# Altium PCB V3.pcbdoc
Units mil, origin at the board's own origin, x right, y up, seen from the top; angles counter-clockwise.
Board outline 2315.8 x 2138.56 mil, 2 copper layers (Top Layer, Bottom Layer); 57 components, 65 nets, 241 pads, 33 vias.
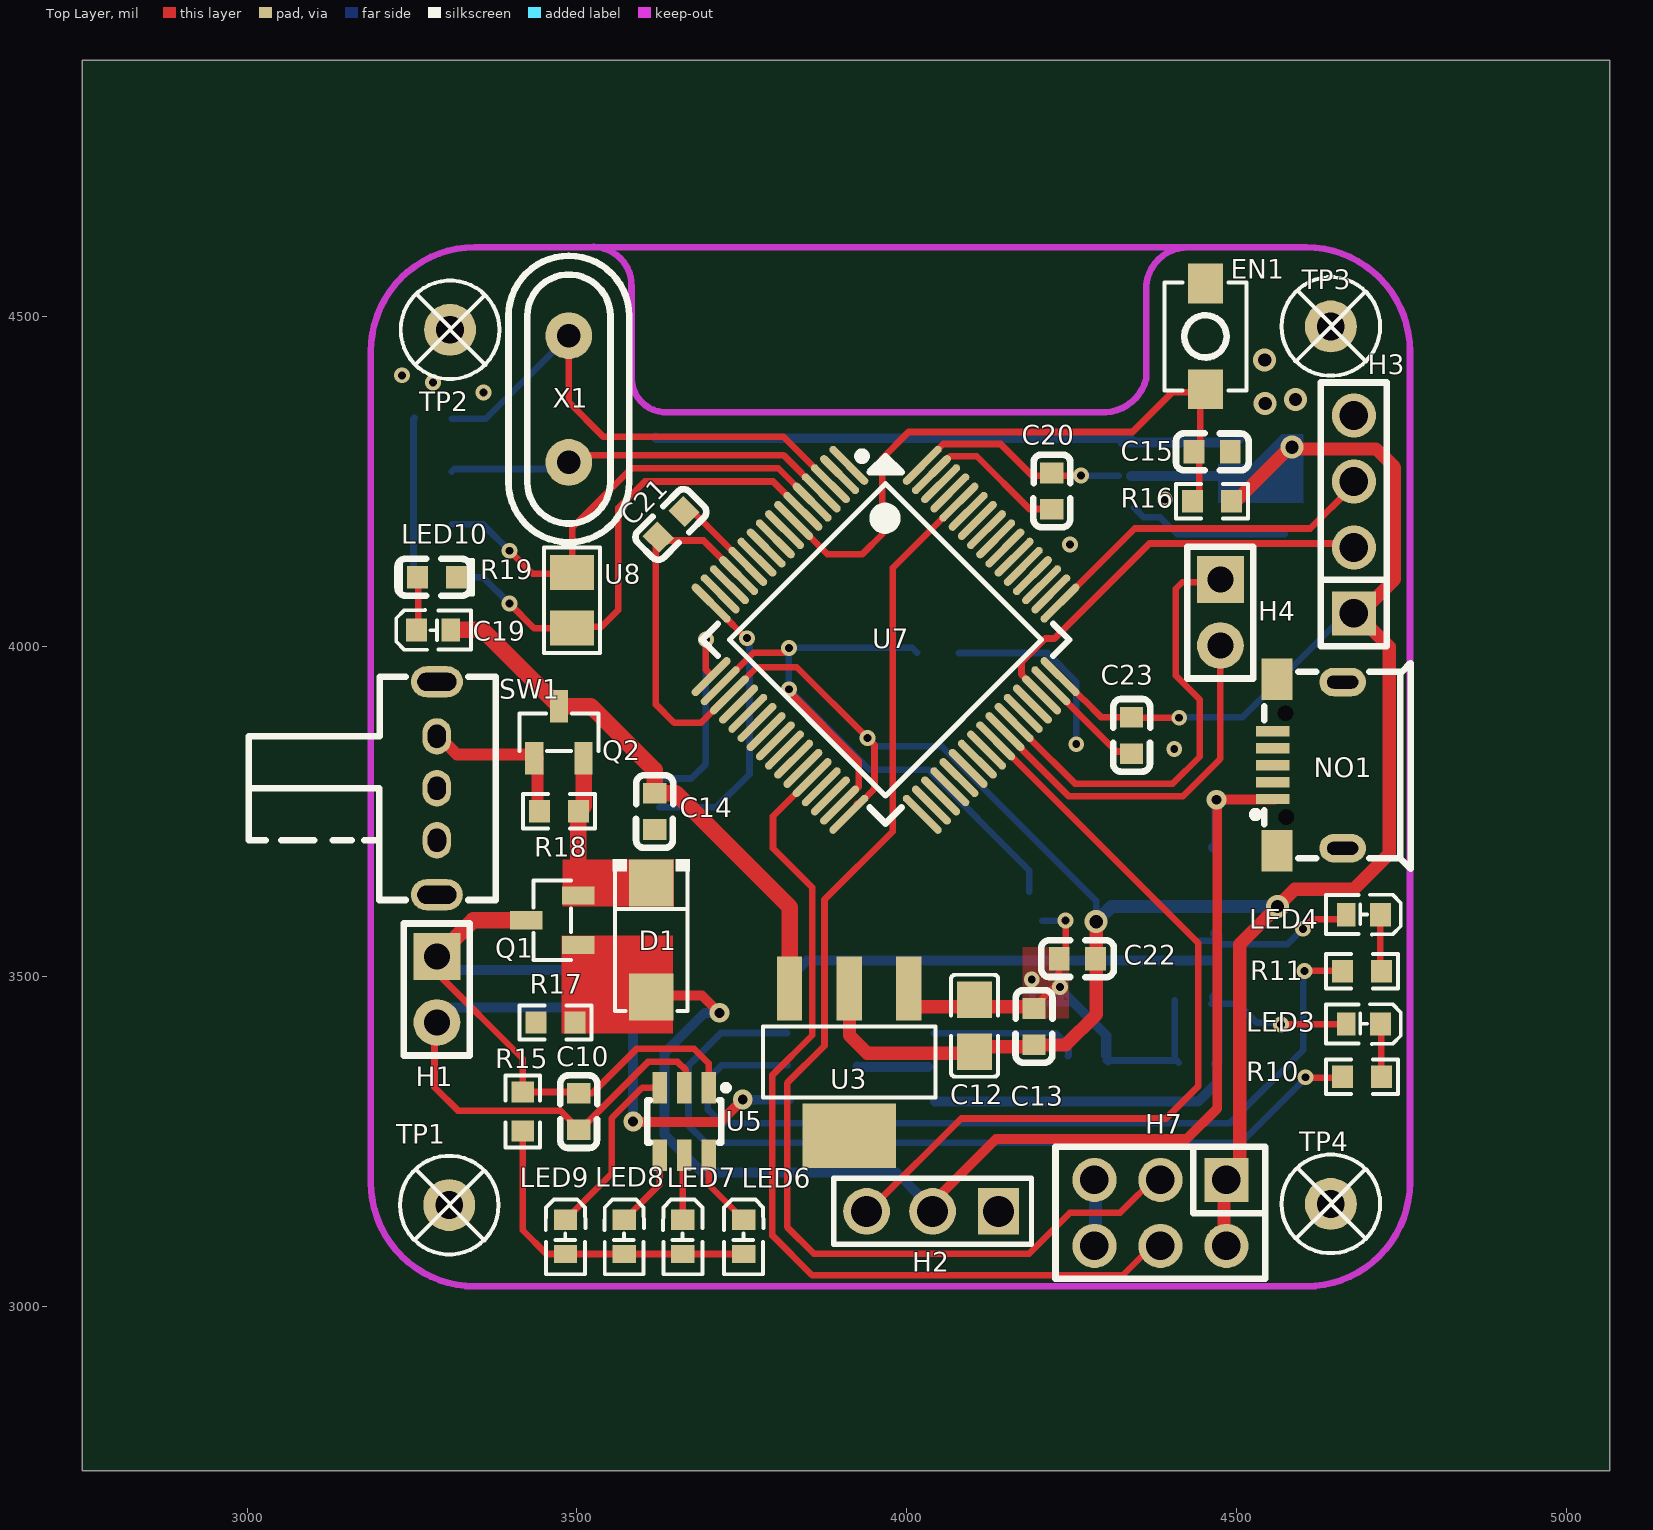
[diagram p0: Top Layer view]
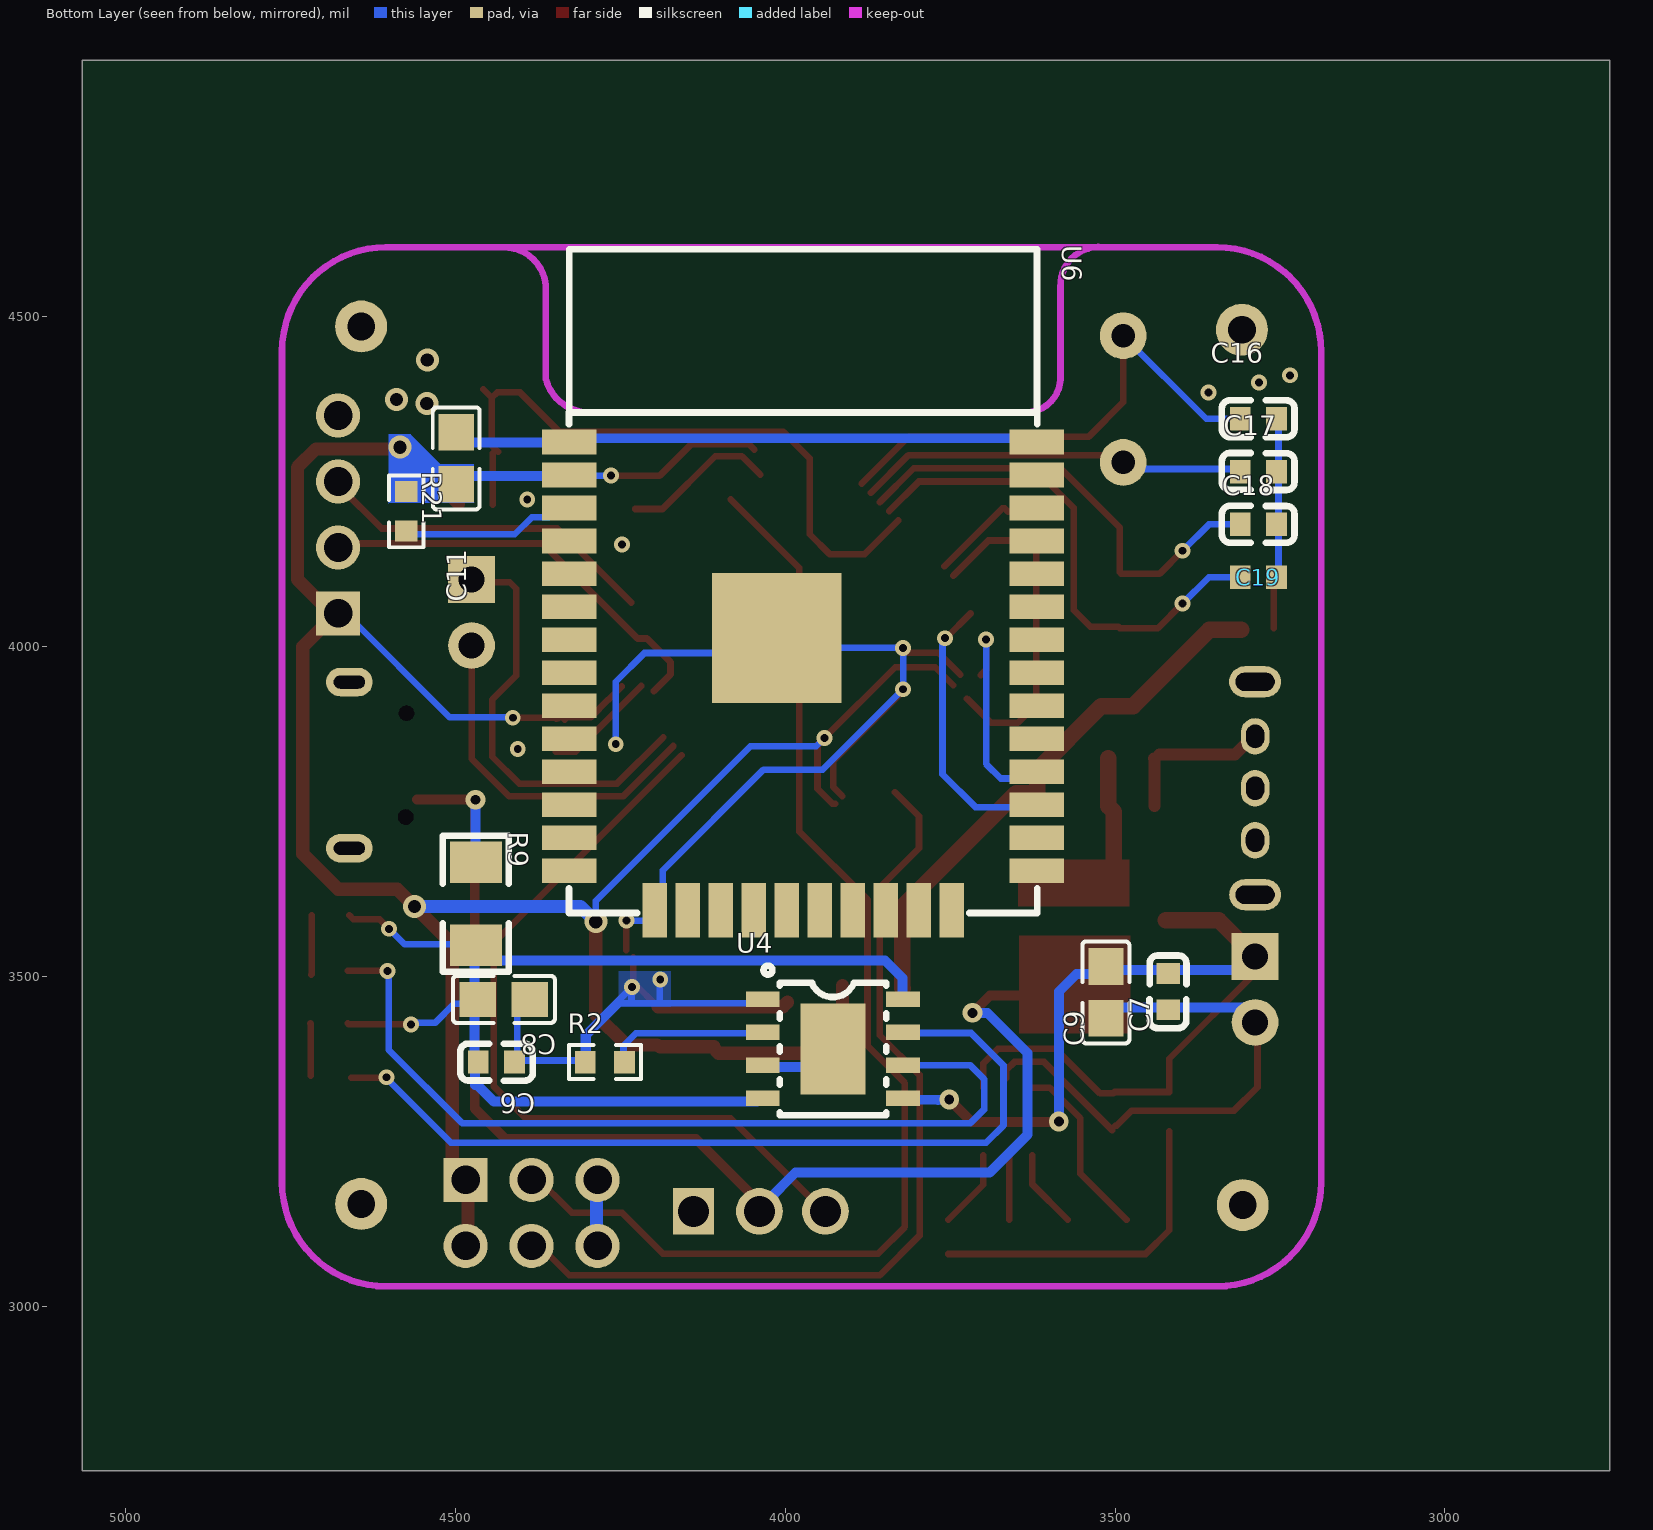
[diagram p1: Bottom Layer view, seen from below]

## Layer stack, top to bottom
Top Layer: signal copper (thickness not stored)
Dielectric: dielectric 12.6, FR-4, Dk 4.8
Bottom Layer: signal copper (thickness not stored)

## Board outline
5065.8,2750 2750,2750 2750,4888.56 5065.8,4888.56

## Components (designator, comment, footprint, x,y, rotation, side; value= is the part's Value field where it differs from the comment)
C6 "CC0603KRX7R9BB104" C0603 4437.91,3369.82 r0 bottom
C7 "CC0603KRX7R9BB104" C0603 3419.7,3476.6 r90 bottom
C8 "CL21A106KAYNNNE_C15850" C0805 4426.53,3464.82 r0 bottom
C9 "CL21A106KAYNNNE_C15850" C0805 3514.01,3475.38 r90 bottom
C10 "CL10A105KB8NNNC" C0603 3502.79,3294.82 r90 top
C11 "CL21A106KAYNNNE_C15850" C0805 4498.7,4284.95 r90 bottom
C12 "CL21A106KAYNNNE_C15850" C0805 4102.79,3424.82 r90 top
C13 "CC0603KRX7R9BB104" C0603 4192.79,3423.59 r270 top
C14 "CC0603KRX7R9BB104" C0603 3617.79,3749.82 r90 top
C15 "CC0603KRX7R9BB104" C0603 4462.79,4294.82 r180 top
C16 "CL10C200JB8NNNC" C0603 3282.79,4344.82 r180 bottom
C17 "CL10C200JB8NNNC" C0603 3282.79,4264.82 r180 bottom
C18 "CL10C200JB8NNNC" C0603 3282.79,4184.82 r180 bottom
C19 "CL10C200JB8NNNC" c0603 3282.79,4104.82 r180 top
C20 "CC0603KRX7R9BB104" C0603 4219.94,4235.26 r270 top
C21 "CC0603KRX7R9BB104" C0603 3642.79,4184.82 r45 top
C22 "CC0603KRX7R9BB104" C0603 4258.68,3526.62 r180 top
C23 "CC0603KRX7R9BB104" C0603 4340.71,3864.8 r270 top
D1 "1N5819_C437199" SMA_L4.4-W2.6-LS5.0-RD 3612.79,3554.82 r270 top
EN1 "TSA343G00-250J2" SW-SMD_L4.0-W2.9-LS5.0 4452.79,4469.82 r90 top
H1 "3-644456-2" HDR-TH_2P-P2.54-V-M-1 3287.79,3479.82 r270 top
H2 "Z-211-0311-0021-001" HDR-TH_3P-P2.54-V-M-1 4039.16,3143.49 r180 top
H3 "PH-00015" HDR-TH_4P-P2.54-V-M 4677.79,4199.82 r90 top
H4 "3-644456-2" HDR-TH_2P-P2.54-V-M-1 4475.4,4051.22 r270 top
H7 "PH-00219" HDR-TH_6P-P2.54-V-M-R2-C3-S2.54 4384.5,3141.17 r180 top
LED3 "TLMS1000-GS08" LED0603-R-RD_BLUE-A 4692.24,3427.48 r180 top
LED4 "19-213/GVC-AMNB/3T_C883167" LED0603-R-RD_BLUE-A 4692.24,3593.36 r180 top
LED6 "LED-0603_R" LED0603-R-RD_BLUE-A 3752.79,3104.82 r270 top
LED7 "LED-0603_R" LED0603-R-RD_BLUE-A 3660.63,3104.82 r270 top
LED8 "LED-0603_R" LED0603-R-RD_BLUE-A 3571.71,3104.82 r270 top
LED9 "LED-0603_R" LED0603-R-RD_BLUE-A 3482.79,3104.82 r270 top
LED10 "LED-0603_R" LED0603-R-RD_BLUE-A 3282.79,4024.82 r0 top
NO1 "MICROUSB-5PIN" USB-SMD_5P_MICROUSB-5PIN 4607.79,3819.82 r90 top
Q1 "SI2301_C181086" SOT-23-3_L2.9-W1.3-P1.90-LS2.4-BR 3462.79,3584.82 r0 top
Q2 "SI2301_C181086" SOT-23-3_L2.9-W1.3-P1.90-LS2.4-BR 3472.79,3869.82 r270 top
R2 "0603WAF1201T5E" R0603 4273.5,3369.83 r180 bottom
R9 "CSR1206FKR250" R1206_1 4468.93,3609.8 r270 bottom
R10 "0603WAF2001T5E" R0603 4690.18,3347.48 r0 top
R11 "RC0603FR-0710KL" R0603 4690.18,3507.48 r0 top
R15 "0603WAF3300T5E" R0603 3417.79,3294.82 r270 top
R16 "ERA3VEB1001V" R0603 4462.79,4219.82 r180 top
R17 "RC0603FR-0710KL" R0603 3467.79,3429.82 r0 top
R18 "RC0603FR-0710KL" R0603 3472.79,3749.82 r180 top
R19 "ERA3VEB1001V" R0603 3287.79,4104.82 r180 top
R21 "RC0603FR-0710KL" R0603 4574.48,4204.68 r270 bottom
SW1 "SK-12D02-VG5_C136722" SW-TH_SK-12D02-VG5 3287.79,3784.82 r270 top
TP1 "M2螺丝" M2螺丝 3306.53,3152.94 r0 top
TP2 "M2螺丝" M2螺丝 3307.79,4479.82 r0 top
TP3 "M2螺丝" M2螺丝 4642.79,4484.82 r0 top
TP4 "M2螺丝" M2螺丝 4642.79,3154.82 r0 top
U3 "AMS1117-3.3_C347256" SOT-223-4_L6.5-W3.5-P2.30-LS7.0-BR 3912.79,3369.82 r90 top
U4 "TP4056D" ESOP-8_L4.9-W3.9-P1.27-LS6.0-TL-EP 3927.79,3389.82 r180 bottom
U5 "LP3772-1" SOT23-6 3662.79,3279.82 r180 top
U6 "ESP32-WROOM-32D-N4_C473012" WIFIM-SMD_39P-L25.5-W18.0-P1.27-BL 3972.79,3954.82 r270 bottom
U7 "STM32F103RCT6" LQFP-64_L10.0-W10.0-P0.50-LS12.0-BL 3967.79,4009.82 r225 top
U8 "X1A0000910001" CRYSTAL-SMD_L3.2-W1.5-3 3492.79,4069.82 r90 top
X1 "X49ST2-8.000-F20JGDT" HC-49S_L11.0-W4.7-P4.88 3487.79,4374.82 r90 top

## Footprints (in the part's own frame and the unit in brackets; to place one, negate y for a bottom-side part, rotate by r counter-clockwise, add the part's x,y. Pads: shape width x height; smd on the part's side, far side on the other; paste and mask are expansions set on the pad)
C0603 [mm]
  rect 0.8x0.9 smd paste+0 mask+0.051: 1(-0.7,0) 2(0.7,0)
  silkscreen extent -1.41,-0.71 1.39,0.72
c0603 [mm]
  rect 0.8x0.9 smd far side paste+0 mask+0.051: 1(-0.7,0) 2(0.7,0)
  silkscreen extent -1.41,-0.71 1.39,0.72
C0805 [mm]
  rect 1.41x1.35 smd paste-100 mask+0.051: 1(-1,0) 2(1,0)
  silkscreen extent -1.96,-0.9 1.96,0.9
CRYSTAL-SMD_L3.2-W1.5-3 [mm]
  rect 1.35x1.7 smd paste+0 mask+0.051: 1(-1.075,0) 2(1.075,0)
  silkscreen extent -2.03,-1.08 2.03,1.08
ESOP-8_L4.9-W3.9-P1.27-LS6.0-TL-EP [mm]
  rect 1.3x0.6 smd paste+0 mask+0.051: 1(-2.7,1.905) 2(-2.7,0.635) 3(-2.7,-0.635) 4(-2.7,-1.905) 5(2.7,-1.905) 6(2.7,-0.635) 7(2.7,0.635) 8(2.7,1.905)
  rect 2.5x3.5 smd paste+0 mask+0.051: 9(0,0)
  silkscreen extent -2.67,-2.55 2.05,3.2
HC-49S_L11.0-W4.7-P4.88 [mm]
  round 1.8 hole 0.9 paste+0 mask+0.051: 1(-2.44,0) 2(2.44,0)
  silkscreen extent -5.52,-2.32 5.52,2.33
HDR-TH_2P-P2.54-V-M-1 [mm]
  rect 1.8x1.8 hole 1 paste+0 mask+0.051: 1(-1.27,0)
  round 1.8 hole 1 paste+0 mask+0.051: 2(1.27,0)
  silkscreen extent -2.54,-1.27 2.54,1.27
HDR-TH_3P-P2.54-V-M-1 [mm]
  rect 1.575x1.8 hole 1.2 paste+0 mask+0.051: 1(-2.54,0)
  round 1.8 hole 1.2 paste+0 mask+0.051: 2(0,0) 3(2.54,0)
  silkscreen extent -3.81,-1.27 3.81,1.27
HDR-TH_4P-P2.54-V-M [mm]
  rect 1.7x1.7 hole 1.1 paste+0 mask+0.051: 1(-3.81,0)
  round 1.7 hole 1.1 paste+0 mask+0.051: 2(-1.27,0) 3(1.27,0) 4(3.81,0)
  silkscreen extent -5.08,-1.27 5.08,1.27
HDR-TH_6P-P2.54-V-M-R2-C3-S2.54 [mm]
  rect 1.7x1.7 hole 1.1 paste+0 mask+0.051: 1(-2.54,-1.27)
  round 1.7 hole 1.1 paste+0 mask+0.051: 2(-2.54,1.27) 3(0,-1.27) 4(0,1.27) 5(2.54,-1.27) 6(2.54,1.27)
  silkscreen extent -4.04,-2.54 4.04,2.54
LED0603-R-RD_BLUE-A [mm]
  rect 0.7x0.9 smd paste+0 mask+0.051: 1(0.66,0)
  rect 0.8x0.9 smd paste+0 mask+0.051: 2(-0.66,0)
  silkscreen extent -1.44,-0.76 1.44,0.76
LQFP-64_L10.0-W10.0-P0.50-LS12.0-BL [mm]
  oval 0.3x2 smd paste+0 mask+0.051: 1(-3.75,-5.75) 2(-3.25,-5.75) 3(-2.75,-5.75) 4(-2.25,-5.75) 5(-1.75,-5.75) 6(-1.25,-5.75) 7(-0.75,-5.75) 8(-0.25,-5.75) 9(0.25,-5.75) 10(0.75,-5.75) 11(1.25,-5.75) 12(1.75,-5.75) 13(2.25,-5.75) 14(2.75,-5.75) 15(3.25,-5.75) 16(3.75,-5.75) 33(3.75,5.75) 34(3.25,5.75) 35(2.75,5.75) 36(2.25,5.75) 37(1.75,5.75) 38(1.25,5.75) 39(0.75,5.75) 40(0.25,5.75) 41(-0.25,5.75) 42(-0.75,5.75) 43(-1.25,5.75) 44(-1.75,5.75) 45(-2.25,5.75) 46(-2.75,5.75) 47(-3.25,5.75) 48(-3.75,5.75)
  oval 2x0.3 smd paste+0 mask+0.051: 17(5.75,-3.75) 18(5.75,-3.25) 19(5.75,-2.75) 20(5.75,-2.25) 21(5.75,-1.75) 22(5.75,-1.25) 23(5.75,-0.75) 24(5.75,-0.25) 25(5.75,0.25) 26(5.75,0.75) 27(5.75,1.25) 28(5.75,1.75) 29(5.75,2.25) 30(5.75,2.75) 31(5.75,3.25) 32(5.75,3.75) 49(-5.75,3.75) 50(-5.75,3.25) 51(-5.75,2.75) 52(-5.75,2.25) 53(-5.75,1.75) 54(-5.75,1.25) 55(-5.75,0.75) 56(-5.75,0.25) 57(-5.75,-0.25) 58(-5.75,-0.75) 59(-5.75,-1.25) 60(-5.75,-1.75) 61(-5.75,-2.25) 62(-5.75,-2.75) 63(-5.75,-3.25) 64(-5.75,-3.75)
  silkscreen extent -5,-5.79 5,5
M2螺丝 [mm]
  round 2 hole 1.07 mask+0.051: 1(0,0)
  silkscreen extent -1.9,-1.9 1.9,1.9
R0603 [mil]
  rect 31.75x34.02 smd paste-3937.01 mask+2: 1(-29.66,0) 2(29.66,0)
  silkscreen extent -55,-26 55,26
R1206_1 [mil]
  rect 63x78.74 smd paste+0 mask+1.97: 1(-62.99,0) 2(62.99,0)
  silkscreen extent -103,-50 103,50
SMA_L4.4-W2.6-LS5.0-RD [mm]
  rect 1.8x1.7 smd paste+0 mask+0.051: 1(-2.192,0) 2(2.192,0)
  silkscreen extent -3.11,-1.48 2.73,1.48
SOT23-6 [mil]
  rect 22.2x47.7 smd paste+0 mask+2: 1(-37,-51) 2(0,-51) 3(37,-51) 4(37,51) 5(0,51) 6(-37,51)
  silkscreen extent -67,-55 56,32
SOT-23-3_L2.9-W1.3-P1.90-LS2.4-BR [mm]
  rect 1.25x0.7 smd paste+0 mask+0.051: 1(1,-0.95) 2(1,0.95) 3(-1,0)
  silkscreen extent -0.73,-1.53 0.73,1.53
SOT-223-4_L6.5-W3.5-P2.30-LS7.0-BR [mm]
  rect 2.47x0.98 smd paste+0 mask+0.051: 1(2.835,-2.3) 2(2.835,0) 3(2.835,2.3)
  rect 2.47x3.6 smd paste+0 mask+0.051: 4(-2.835,0)
  silkscreen extent -1.37,-3.33 1.37,3.33
SW-SMD_L4.0-W2.9-LS5.0 [mm]
  rect 1.53x1.36 smd paste+0 mask+0.051: 1(-2.035,0) 2(2.035,0)
  silkscreen extent -2.08,-1.58 2.08,1.58
SW-TH_SK-12D02-VG5 [mm]
  oval 1.4x1.1 hole 0.7 slot 0.9 at 0 deg copper offset 0.001,0 paste+0 mask+0.051: 1(-2,-0.001)
  oval 1.4x1.1 hole 0.7 slot 0.9 at 0 deg paste+0 mask+0.051: 2(0,0)
  oval 1.4x1.1 hole 0.7 slot 0.9 at 0 deg copper offset -0.001,0 paste+0 mask+0.051: 3(2,0.001)
  oval 1.2x2 hole 0.7 slot 1.5 at 90 deg copper offset 0,-0.001 paste+0 mask+0.051: 4(4.099,0)
  oval 1.2x2 hole 0.7 slot 1.5 at 90 deg copper offset 0,0 paste+0 mask+0.051: 5(-4.1,0)
  silkscreen extent -4.3,-7.25 4.3,2.27
USB-SMD_5P_MICROUSB-5PIN [mm]
  rect 0.4x1.3 smd paste-100 mask+0.05: 1(-1.3,1.345) 2(-0.65,1.345) 3(0,1.345) 4(0.65,1.345) 5(1.3,1.345)
  rect 1.6x1.2 smd paste-100 mask+0.05: 6(3.3,1.185) 7(-3.3,1.185)
  oval 1.1x1.8 hole 0.5 slot 1.2 at 90 deg paste+0 mask+0.05: 8(3.2,-1.345) 9(-3.2,-1.345)
  Multi-Layer board cut-out: 2,0.555 2.13,0.585 2.235,0.668 2.292,0.788 2.292,0.922 2.235,1.042 2.13,1.125 2,1.155 2,1.155 1.87,1.125 1.765,1.042 1.708,0.922 1.708,0.788 1.765,0.668 1.87,0.585 2,0.555
  Multi-Layer board cut-out: -2,0.525 -1.87,0.555 -1.765,0.638 -1.708,0.758 -1.708,0.892 -1.765,1.012 -1.87,1.095 -2,1.125 -2,1.125 -2.13,1.095 -2.235,1.012 -2.292,0.892 -2.292,0.758 -2.235,0.638 -2.13,0.555 -2,0.525
  silkscreen extent -3.99,-3.96 3.93,2.14
WIFIM-SMD_39P-L25.5-W18.0-P1.27-BL [mm]
  rect 0.95x2.1 smd paste+0 mask+0.051: 1(-9.015,-9) 2(-7.745,-9) 3(-6.475,-9) 4(-5.205,-9) 5(-3.935,-9) 6(-2.665,-9) 7(-1.395,-9) 8(-0.125,-9) 9(1.145,-9) 10(2.415,-9) 11(3.685,-9) 12(4.955,-9) 13(6.225,-9) 14(7.495,-9) 25(7.495,9) 26(6.225,9) 27(4.955,9) 28(3.685,9) 29(2.415,9) 30(1.145,9) 31(-0.125,9) 32(-1.395,9) 33(-2.665,9) 34(-3.935,9) 35(-5.205,9) 36(-6.475,9) 37(-7.745,9) 38(-9.015,9)
  rect 2.1x0.95 smd paste+0 mask+0.051: 15(9.015,-5.715) 16(9.015,-4.445) 17(9.015,-3.175) 18(9.015,-1.905) 19(9.015,-0.635) 20(9.015,0.635) 21(9.015,1.905) 22(9.015,3.175) 23(9.015,4.445) 24(9.015,5.715)
  rect 5x5 smd paste+0 mask+0.051: 39(-1.472,-1.017)
  silkscreen extent -16.44,-9.02 9.12,9.02

## Via types
v1: diameter 24, hole 12, Top Layer to Bottom Layer, 19 vias
v2: diameter 35, hole 20, Top Layer to Bottom Layer, 6 vias
v3: diameter 24.02, hole 12.01, Top Layer to Bottom Layer, 4 vias
v4: diameter 30, hole 15, Top Layer to Bottom Layer, 4 vias

## Nets (pads, with @x,y where several pads share a name; then routed paths per layer and width w, separated by ;. In a path a pad name is that pad's centre, name@x,y a point inside that pad or via, vN(x,y) a via of type N, cw(c..) or ccw(c..) an arc to the next point about the centre after c; other vN are vias at no path point)
3V3: C11.1 C12.1 C13.2 C20.1 C21.1 C22.1 C23.1 H3.1 H7.1 H7.2 R16.1 R21.1 U3.2 U6.2 U7.13 U7.19 U7.32 U7.48 U7.64 | length 5073
  Top Layer w10: C21.1@3619.75,4167.68 3619.75,3911.6 3647.26,3884.1 3688.13,3884.1 U7.19@3724.7,3920.67 ; C21.1@3633.3,4160.33 3692.01,4160.33 U7.13 ; U7.19@3745.34,3940.92 3772.64,3968.22 3833.35,3968.22 v1(3940.73,3860.84) ; U7.32@3924.28,3761.48 3928.31,3761.48 3951.06,3784.22 3951.06,3850.45 v1(3940.73,3860.84) ; U7.64@4046.72,4298.05 4055.4,4306.72 4142.26,4306.72 4190.7,4258.28 4263.85,4258.28 v1(4264.32,4258.75) ; U7.48@4247.77,3939.07 4267.14,3919.7 4267.78,3919.7 4295.16,3892.32 C23.1@4330.96,3892.32 ; C23.1@4334.43,3888.85 C23.1@4330.96,3892.32 ; C23.1@4344.36,3891.14 4343.17,3892.32 C23.1@4330.96,3892.32 ; C23.1@4347.03,3890.12 4348.68,3891.77 v1(4412.93,3891.77) ; H3.1@4677.28,4039.65 H3.1@4684.25,4046.62
  Top Layer w20: U3.2@3912.98,3485.61 3912.98,3410.36 3940.09,3383.25 4101.02,3383.25 C12.1@4104.05,3386.28 ; C12.1@4107.86,3393.11 C13.2@4189.75,3393.11 ; C13.2@4193.27,3394.7 4194.29,3395.71 4241.03,3395.71 4287.16,3441.84 v2(4287.16,3582.6) ; H7.1@4479.34,3207.13 4481.04,3205.42 H7.2@4481.04,3111.59 ; R16.1@4495.09,4216.24 4578.12,4299.27 4711.29,4299.27 4739.36,4271.2 4739.36,4101.74 4684.25,4046.62 4731.49,3999.37 4731.49,3685.64 4677.68,3631.82 4588.37,3631.82 ; H7.1@4499.05,3184.12 4504.78,3189.84 4504.78,3548.23 4588.37,3631.82 ; v2(4561.77,3605.45) 4588.14,3631.82 4588.37,3631.82
  Bottom Layer w10: v1(3940.73,3860.84) 3952.98,3848.58 4052.74,3848.58 4287.16,3614.17 v2(4287.16,3582.6) ; v1(4264.32,4258.75) 4264.71,4258.36 U6.2@4321.61,4258.36 ; v1(4412.93,3891.77) 4413.44,3892.28 4508.44,3892.28 4664.68,4048.53 H3.1@4678.83,4048.53
  Bottom Layer w15: U6.2@4339.68,4258.1 4500.76,4258.1 C11.1@4511.49,4258.1
  Bottom Layer w20: v2(4287.16,3582.6) 4310.15,3605.59 4557.82,3605.59 4557.97,3605.45 v2(4561.77,3605.45) ; C11.1@4500.76,4258.1 4533.77,4254.79 4580.86,4301.88 v2(4583.78,4301.88)
$2N349: R2.2 U4.2 | length 228.1
  Bottom Layer w10: U4.2@4041.21,3413.43 4226.22,3413.43 4245.17,3394.47 4245.17,3379.31 R2.2@4244.41,3378.55
$2N379: R10.1 U4.7 | length 1302.8
  Top Layer w10: v1(4604.44,3346.83) 4605.42,3345.85 R10.1@4657.52,3345.85
  Bottom Layer w10: U4.7@3819.05,3413.81 3718.2,3413.81 3669.17,3364.77 3669.17,3273.79 3695.29,3247.67 4506.92,3247.67 4604.44,3345.19 v1(4604.44,3346.83)
$2N380: R11.1 U4.6 | length 1313.2
  Top Layer w10: v1(4602.86,3507.73) 4603.62,3508.49 R11.1@4662.76,3508.49
  Bottom Layer w10: U4.6@3819.62,3365.18 3719.78,3365.18 3698.63,3344.03 3698.63,3297.96 3719.35,3277.23 4489.89,3277.23 4601.2,3388.55 4601.2,3506.07 v1(4602.86,3507.73)
$2N691: LED9.2 U5.3 | length 275.1
  Top Layer w10: LED9.2 3552.79,3200.81 3552.79,3284.82 3598.79,3330.82 U5.3
$2N692: LED8.2 U5.4 | length 120.4
  Top Layer w10: LED8.2 3625.79,3184.88 U5.4
$2N693: LED7.2 U5.5 | length 98.9
  Top Layer w10: LED7.2 3660.63,3226.67 U5.5
$2N694: LED6.2 U5.6 | length 120
  Top Layer w10: U5.6 3699.79,3183.81 LED6.2
$2N695: LED6.1 LED7.1 LED8.1 LED9.1 R15.2 | length 500.2
  Top Layer w10: R15.2 3417.79,3114.82 3453.78,3078.84 LED9.1 LED8.1 LED7.1 LED6.1
$2N937: LED3.2 R10.2 | length 79.1
  Top Layer w10: R10.2@4719.12,3349.39 4719.12,3427.74 LED3.2@4719.63,3428.24
$2N938: LED4.2 R11.2 | length 90.4
  Top Layer w10: LED4.2@4717.61,3592.02 4717.61,3503.05 R11.2@4718.62,3502.04
$2N62310: D1.1 Q1.2 Q2.2 R18.1 | length 330
  Top Layer w25: Q2.2 3510.19,3757.56 3502.16,3749.53 Q1.2 3593.87,3622.22 D1.1
$2N62328: Q2.1 R18.2 SW1.1 | length 226
  Top Layer w18: SW1.1@3290.33,3863.93 3318.49,3835.77 Q2.1@3432.82,3835.77 ; R18.2@3440.29,3758.08 3440.29,3828.99 Q2.1@3440.96,3829.67
$2N62477: H4.1 U7.43 | length 634.4
  Top Layer w10: U7.43@4184.88,3861.88 4254.93,3791.83 4403.26,3791.83 4443.98,3832.55 4443.98,3919.24 4407.64,3955.58 4407.64,4087.27 4417.58,4097.21 H4.1@4463.12,4097.21
$2N62479: H4.2 U7.42 | length 530.7
  Top Layer w10: U7.42@4169.55,3848.9 4245.89,3772.56 4418.4,3772.56 4475.1,3829.27 4475.1,3997.7 H4.2@4476.21,3998.8
$2N64251: LED10.2 R19.2 | length 84.7
  Top Layer w10: R19.2@3254.46,4110.01 3259.52,4104.95 LED10.2@3259.52,4027.36
+5V: D1.2 H2.2 NO1.1 Q1.1 R9.1 R17.2 | length 2214.3
  Top Layer w15: D1.2@3620.43,3470.58 3689.8,3470.58 v4(3715.96,3444.42) ; H2.2@4049.12,3147.12 4049.12,3166.58 4135.5,3252.96 4424.19,3252.96 4470.62,3299.39 4470.62,3766.25 v4(4469.48,3767.39) 4481.48,3767.39 4481.99,3767.9 NO1.1@4558.32,3767.9
  Top Layer w25: R17.2 3497.45,3542.71 Q1.1 3502.16,3468.51 D1.2
  Bottom Layer w15: v4(3715.96,3444.42) 3693.22,3444.42 3632.56,3383.76 3632.56,3259.6 3689.99,3202.17 3984.37,3202.17 H2.2@4028.73,3157.81 ; R9.1@4464.3,3695.23 4469.48,3700.41 v4(4469.48,3767.39)
BOOT0: H7.3 U7.60 | length 1841.1
  Top Layer w10: U7.60@4082.78,4222.83 3978.64,4118.69 3978.64,3719.34 3875.36,3616.07 3875.36,3394.66 3818.69,3337.99 3818.69,3119.99 3859.44,3079.24 4185.48,3079.24 4247.5,3141.27 4323.33,3141.27 H7.3@4381.1,3199.04
BOOT1: H7.4 U7.28 | length 1371.8
  Top Layer w10: U7.28@3833.87,3779.07 3797.3,3742.5 3797.3,3693.95 3856.61,3634.63 3856.61,3410.58 3796.34,3350.3 3796.34,3106.78 3856.49,3046.63 4327.47,3046.63 H7.4@4383.2,3102.36
CLK: U6.20
CMD: U6.19
EN: R21.2 U6.3 | length 245
  Bottom Layer w10: U6.3@4344.4,4210.28 4358.9,4195.78 4384.09,4195.78 4410.04,4169.82 R21.2@4572.64,4169.82
GND: C6.1 C7.1 C8.1 C9.1 C10.1 C11.2 C12.2 C13.1 C14.1 C15.1 C16.2 C17.2 C18.2 C19.2 C20.2 C21.2 C22.2 C23.2 EN1.2 H1.2 H2.1 H3.4 H7.5 H7.6 NO1.5 NO1.6 NO1.7 NO1.8 NO1.9 R2.1 R17.1 R19.1 SW1.2 SW1.3 U3.1 U4.1 U4.3 U4.9 U5.2 U6.1 U6.15 U6.38 U6.39 U7.12 U7.18 U7.31 U7.47 U7.63 | length 5168.6
  Top Layer w10: H1.2@3284.16,3432.2 3284.16,3331.63 3319.62,3296.18 3474.71,3296.18 3497.45,3273.43 C10.1@3499.42,3273.43 ; C10.1@3504.02,3266.29 3607.84,3370.1 3652.62,3370.1 3665.18,3357.55 U5.2@3665.18,3345 ; C21.2 3667.28,4209.31 3670.86,4209.31 U7.12 ; U7.18@3734.58,3957.16 3767.59,3990.17 3814.1,3990.17 v1(3821.63,3997.69) ; v1(3821.31,3934.94) 3821.31,3932.08 3927.49,3825.9 3927.49,3786.99 U7.31@3913.49,3772.99 ; U7.63@4037.79,4260.22 4065.76,4288.19 4105.98,4288.19 4186.06,4208.11 4227.42,4208.11 C20.2@4227.51,4208.03 ; C13.1@4192.06,3452.51 4230.25,3490.7 C22.2@4230.25,3528.51 ; U7.47@4218.28,3939.86 4317.51,3840.63 C23.2@4348.05,3840.63 ; C22.2@4240.78,3539.04 4240.78,3585.81 v1@4241.36,3586.39
  Top Layer w20: U3.1@3996.76,3460.59 4003.59,3453.76 C13.1@4192.39,3453.76
  Bottom Layer w10: C19.2@3252.32,4095.22 3252.32,4345.07 C16.2@3253.88,4346.62 ; U6.39@4015.99,3989.98 4008.28,3997.69 v1(3821.63,3997.69) 3821.31,3997.37 v1(3821.31,3934.94) 3943.07,3813.18 4032.73,3813.18 4185.69,3660.22 U6.15@4185.69,3628.22 ; U4.1@4039.69,3458.92 4187.44,3458.92 ; U6.39@4079.17,3989.84 4213.41,3989.84 4256.91,3946.34 v1(4256.91,3851.63) ; v1(4189.48,3494.87) 4190.17,3494.19 4190.17,3461.65 4187.44,3458.92 ; U6.15@4205.11,3584.05 4240.19,3584.05 v1(4240.78,3584.64) ; v1(4232.42,3483.51) v1@4233.04,3482.89 ; R2.1@4299.76,3379.31 4299.76,3409.64 4250.48,3458.92 4233.04,3458.92 ; R2.1@4301.8,3372.23 R2.1@4305.32,3372.23 ; R2.1@4305.32,3369.91 R2.1@4305.32,3372.23 ; C8.1@4406.17,3463.43 4406.17,3374.86 C6.1@4408.8,3372.23 ; C6.1@4412.3,3368.72 C6.1@4408.8,3372.23 ; 4187.44,3458.92 4233.04,3458.92 ; 4233.04,3458.92 v1@4233.04,3482.89 ; v1@4233.04,3482.89 4305.32,3410.61 R2.1@4305.32,3372.23 ; R2.1@4305.32,3372.23 C6.1@4408.8,3372.23
  Bottom Layer w15: H1.2@3296.76,3446.57 3302.45,3452.26 C9.1@3519.68,3452.26 ; U6.38@3619.06,4316.96 3620.65,4315.37 U6.1@4338.09,4315.37 ; U4.9@3925.2,3363.38 3925.96,3362.63 U4.3@4032.87,3362.63 ; U6.1@4326.96,4309.01 4498.76,4309.01 C11.2@4505.12,4315.37
  Bottom Layer w20: H7.6@4286.21,3092.44 H7.5@4286.21,3202.07
  other v1: 4405.41,3844.17 4247.65,4154.24 4391.03,4222.43 3358.21,4384.79 3281.91,4399.99 3234.85,4410.81
  other v2: 4543.28,4368.22 4589.08,4374.33 4542.51,4433.87
IO0: U6.25
IO2: U6.24
IO4: U6.26
IO5: U6.29
IO12: U6.14
IO13: U6.16
IO14: U6.13
IO15: U6.23
IO16: U6.27 U7.16 | length 419.3
  Top Layer w10: U7.16@3719.25,4049.78 3756.72,4012.3 v3(3757.58,4012.3)
  Bottom Layer w10: U6.27@3624.61,3756.21 3711.62,3756.21 3761.6,3806.18 3761.6,4008.28 v3(3757.58,4012.3)
IO17: U6.28 U7.17 | length 325.5
  Top Layer w10: v3(3695.59,4010.27) 3695.59,3964.33 U7.17@3703.6,3956.32
  Bottom Layer w10: U6.28@3625,3799.62 3673.34,3799.62 3695.51,3821.79 3695.51,3995.26 3695.59,3995.34 v3(3695.59,4010.27)
IO18: U6.30
IO19: U6.31
IO21: U6.33
IO22: U6.36
IO23: U6.37
IO25: U6.10
IO26: U6.11
IO27: U6.12
IO32: U6.8
IO33: U6.9
IO34: U6.6
IO35: U6.7
OSC32_IN: C16.1 U7.3 X1.2 | length 778.3
  Top Layer w10: X1.2 3487.79,4369.82 3539.67,4317.94 3812.79,4317.94 U7.3
  Bottom Layer w10: C16.1 3361.73,4344.82 X1.2
OSC32_OUT: C17.1 U7.4 X1.1 | length 594.1
  Top Layer w10: X1.1 3498.85,4289.82 3813.06,4289.82 U7.4
  Bottom Layer w10: C17.1 3314.29,4268.76 3477.79,4268.76 X1.1
OSC_IN: C18.1 U7.5 U8.2 | length 704.3
  Top Layer w10: v3(3397.79,4144.82) 3432.79,4109.82 3490.47,4109.82 U8.2 3492.79,4179.82 3582.79,4269.82 3805.23,4269.82 U7.5
  Bottom Layer w10: C18.1 3357.79,4184.82 v3(3397.79,4144.82)
OSC_OUT: C19.1 U7.6 U8.1 | length 765.8
  Top Layer w10: v3(3397.79,4064.82) 3435.12,4027.5 U8.1 3495.12,4029.82 3537.79,4029.82 3562.79,4054.82 3562.79,4209.82 3602.79,4249.82 3797.38,4249.82 U7.6
  Bottom Layer w10: C19.1 3357.79,4104.82 v3(3397.79,4064.82)
PA8: H2.3 U7.41 | length 1187.4
  Top Layer w10: H2.3@3949.78,3151.44 4082.6,3284.26 4392.9,3284.26 4442.14,3333.5 4442.14,3549.91 U7.41@4157.03,3835.02
RESET: C15.2 EN1.1 R16.2 U7.7 | length 998.7
  Top Layer w10: U7.7 3879.55,4139.82 3932.79,4139.82 3962.79,4169.82 3962.79,4284.82 4002.79,4324.82 4341.99,4324.82 4402,4384.84 4436.53,4384.84 EN1.1@4444.73,4376.64 ; C15.2 C15.2@4438.13,4297.72 ; R16.2@4443.13,4214.82 4443.13,4292.72 C15.2@4438.13,4297.72 ; EN1.1@4457.79,4389.7 EN1.1@4444.73,4376.64 ; C15.2@4438.13,4297.72 4444.73,4304.32 EN1.1@4444.73,4376.64
RXD0: U6.34
SD0: U6.21
SD1: U6.22
SD2: U6.17
SD3: U6.18
SWCLK: H3.3 U7.49 | length 512.7
  Top Layer w10: U7.49@4233.46,4066.41 4345.67,4178.63 4611.73,4178.63 H3.3@4673.9,4240.8
SWDIO: H3.2 U7.46 | length 634.7
  Top Layer w10: U7.46@4199.17,3932.2 4173.97,3957.4 4173.97,3976.09 4209.7,4011.82 4223.84,4011.82 4367.9,4155.88 H3.2@4679.88,4155.88
TXD0: U6.35
VCC4: C6.2 C8.2 LED3.1 LED4.1 R9.2 U4.4 U4.8 | length 1814.9
  Top Layer w10: v1(4567.35,3426.98) 4661.37,3426.98 LED3.1@4662.89,3428.5 ; v1(4600.44,3571.81) 4614.98,3586.35 4654.69,3586.35 LED4.1@4660.62,3592.27
  Bottom Layer w10: R9.2@4438.83,3553.98 4471.12,3553.98 4476.97,3548.14 4576.76,3548.14 v1(4600.44,3571.81) ; C8.2@4461.96,3458.07 4471.12,3458.07 4502.15,3458.07 4530.96,3429.25 4565.08,3429.25 v1(4567.35,3426.98)
  Bottom Layer w15: U4.8@3822.59,3471.18 3822.21,3471.56 3822.21,3497.08 3848.87,3523.75 R9.2@4471.12,3523.75 ; U4.4@4042.98,3309.8 4441.8,3309.8 4466.83,3334.82 ; C8.2@4465.81,3468.27 C8.2@4468.09,3466 ; R9.2@4467.33,3564.57 4471.12,3560.77 4471.12,3553.98 R9.2@4471.12,3523.75 ; C6.2@4468.34,3366.67 C6.2@4470.36,3368.69 ; 4470.36,3334.82 C6.2@4470.36,3368.69 ; C6.2@4470.36,3368.69 4471.12,3369.45 4471.12,3458.07 R9.2@4471.12,3523.75
VCCBAT: C7.2 C9.2 C10.2 H1.1 Q1.3 R15.1 U4.5 U5.1 | length 1550.8
  Top Layer w10: H1.1 3287.79,3504.82 3417.79,3374.82 R15.1 3500.69,3324.48 C10.2 3522.79,3322.38 3590.23,3389.82 3677.79,3389.82 3699.79,3367.83 U5.1
  Top Layer w15: v4(3585.27,3279.7) 3586.03,3278.94 3717.2,3278.94 v4(3751.32,3313.06)
  Top Layer w25: H1.1 3342.79,3584.82 Q1.3
  Bottom Layer w15: H1.1@3285.39,3509.12 C9.2@3518.54,3509.12 ; C9.2@3512.86,3514.81 C9.2@3518.54,3509.12 ; C9.2@3524.23,3510.26 3523.09,3509.12 C9.2@3518.54,3509.12 ; v4(3585.27,3279.7) 3585.27,3476.52 3558.35,3503.44 3524.23,3503.44 C9.2@3518.54,3509.12 ; v4(3751.32,3313.06) 3751.7,3312.68 3769.14,3312.68 ; 3768.38,3311.92 3769.14,3312.68 ; U4.5@3821.46,3312.68 3769.14,3312.68
VCCIN: C14.2 LED10.1 Q2.3 U3.3 | length 832.2
  Top Layer w25: LED10.1 3357.16,4024.82 Q2.3 3521.34,3909.19 3617.79,3812.74 C14.2 3650.01,3777.38 3822.79,3604.6 3822.79,3481.98 U3.3
VN: U6.5
VP: U6.4
"": NO1.2 NO1.3 NO1.4 SW1.4 SW1.5 TP1.1 TP2.1 TP3.1 TP4.1 U3.4 U6.32 U7.1 U7.2 U7.8 U7.9 U7.10 U7.11 U7.14 U7.15 U7.20 U7.21 U7.22 U7.23 U7.24 U7.25 U7.26 U7.27 U7.29 U7.30 U7.33 U7.34 U7.35 U7.36 U7.37 U7.38 U7.39 U7.40 U7.44 U7.45 U7.50 U7.51 U7.52 U7.53 U7.54 U7.55 U7.56 U7.57 U7.58 U7.59 U7.61 U7.62

## Polygon pours and split planes (outlines as drawn)
GND on Top Layer (solid, remove dead copper, pour order 0): 3142.39,3000 4807.94,3000 4807.94,4638.5 3142.39,4638.5
GND on Bottom Layer (solid, remove dead copper, pour order 1): 3138.59,3003.86 4815.8,3003.86 4815.8,4638.56 3138.59,4638.56

## Keep-outs
Board Outline Layer:
  lines w10 net "": 3517.79,4604.82 cw(c3524.72,4547.12) 3582.79,4544.82 3582.79,4404.82 ccw(c3635.42,4407.36) 3638.46,4354.75 ; 3637.79,4354.75 4297.79,4354.75 ; 4292.79,4354.82 ccw(c4297.89,4421.69) 4362.79,4404.82 ; 4362.79,4405.18 4362.79,4545.18 ; 4362.79,4539.82 cw(c4426.08,4541.53) 4427.79,4604.82 ; 3187.79,3187.3 ccw(c3345.27,3187.3) 3345.27,3029.82 4605.31,3029.82 ccw(c4605.31,3187.3) 4762.79,3187.3 4762.79,4447.34 ccw(c4605.31,4447.34) 4605.31,4604.82 3345.27,4604.82 ccw(c3345.27,4447.34) 3187.79,4447.34 3187.79,3187.3

## Other copper
Top Layer:
  region net +5V: 3477.29,3413.54 3645.25,3413.54 3645.25,3561.14 3477.29,3561.14
  region net $2N62310: 3478.29,3606.19 3646.92,3606.19 3646.92,3676.39 3478.29,3676.39
Bottom Layer:
  region net 3V3: 4601.22,4321.47 4567.29,4321.47 4567.29,4320.46 4522.85,4276.01 4471.96,4276.01 4471.96,4218 4471.28,4217.32 4600.2,4217.32 4601.22,4216.3